# Altium PCB PCB1.PcbDoc
Units mm, origin at the board's own origin, x right, y up, seen from the top; angles counter-clockwise.
Board outline 48.7 x 34.7 mm, 2 copper layers (Top Layer, Bottom Layer); 20 components, 15 nets, 109 pads, 24 vias.
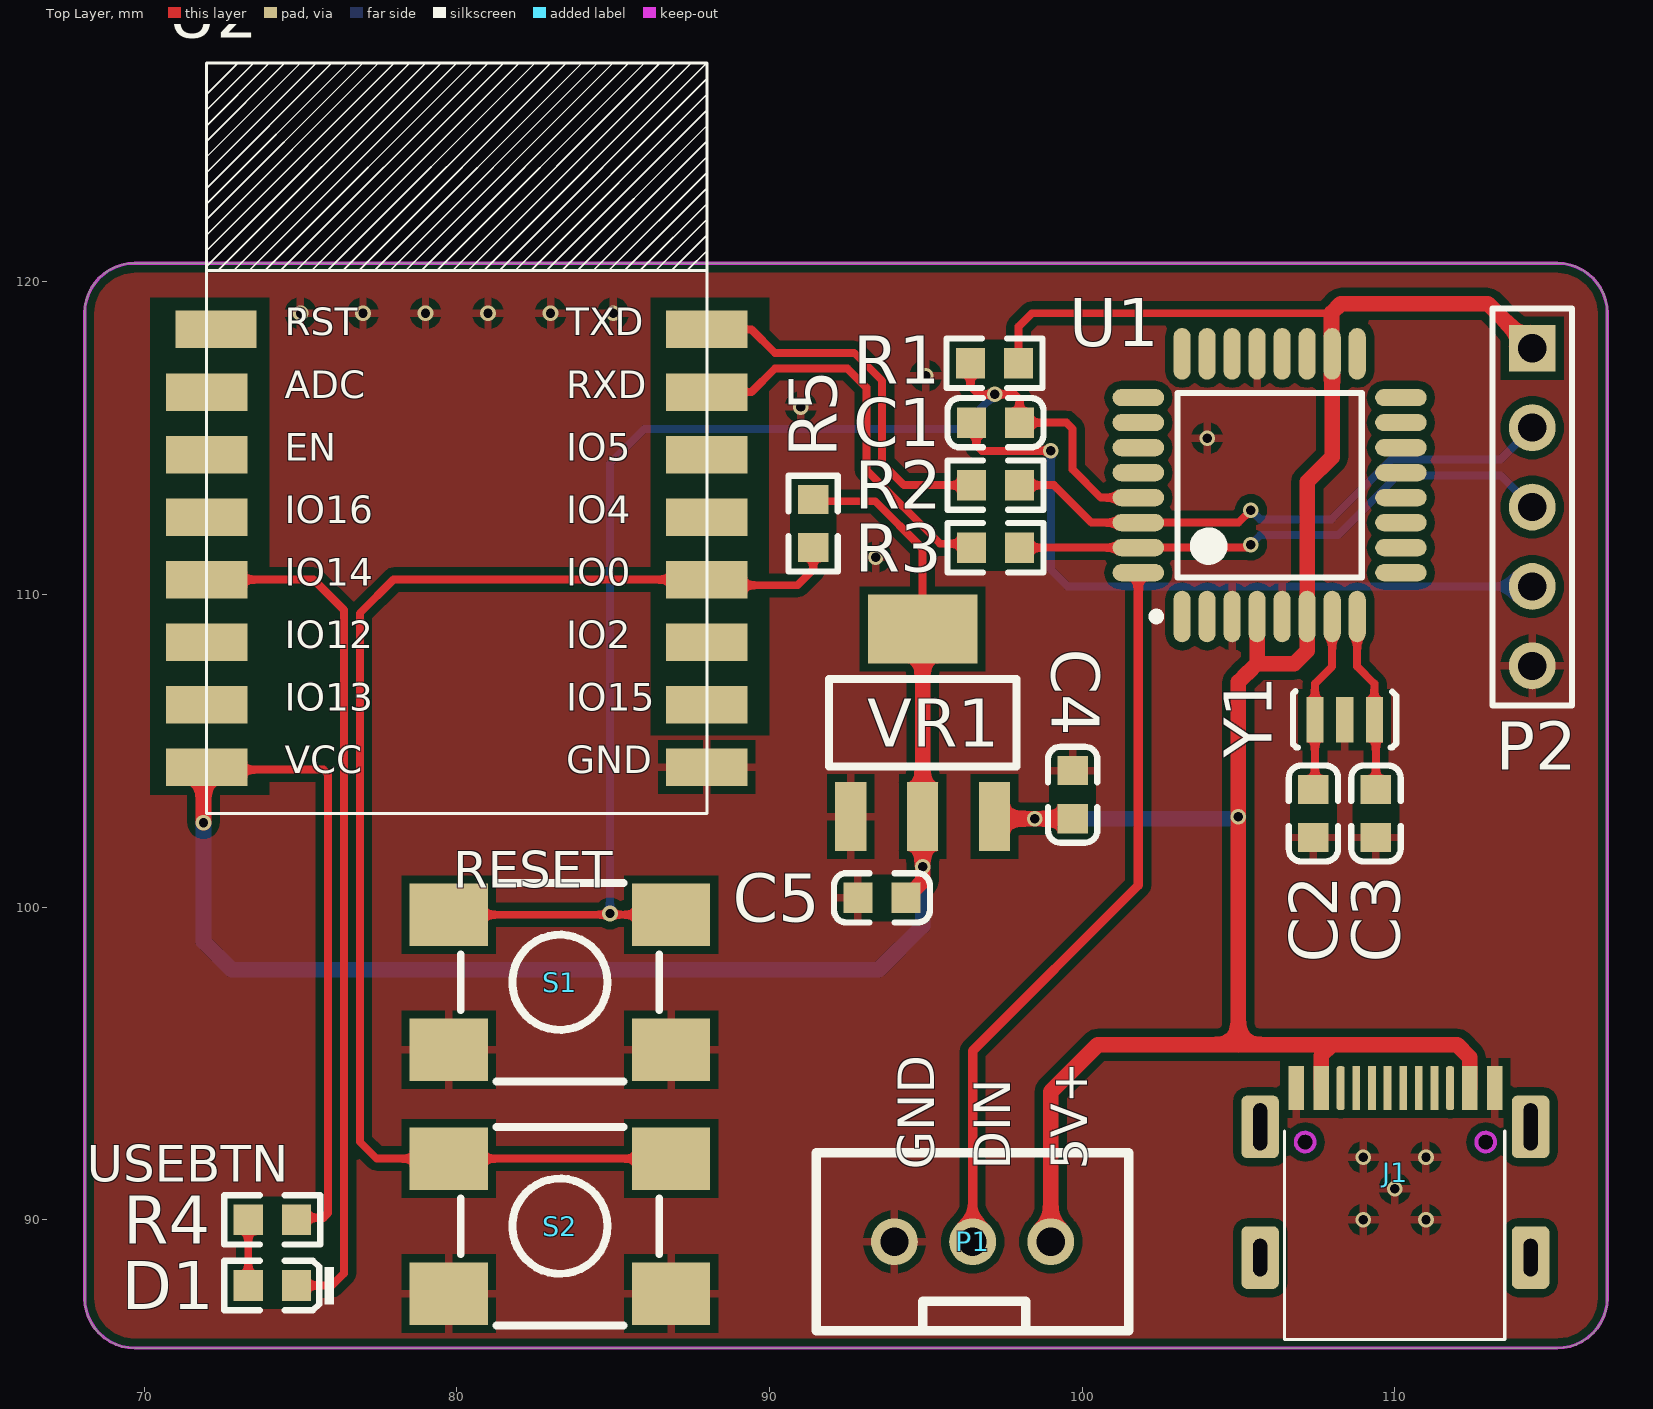
[diagram p0: Top Layer view]
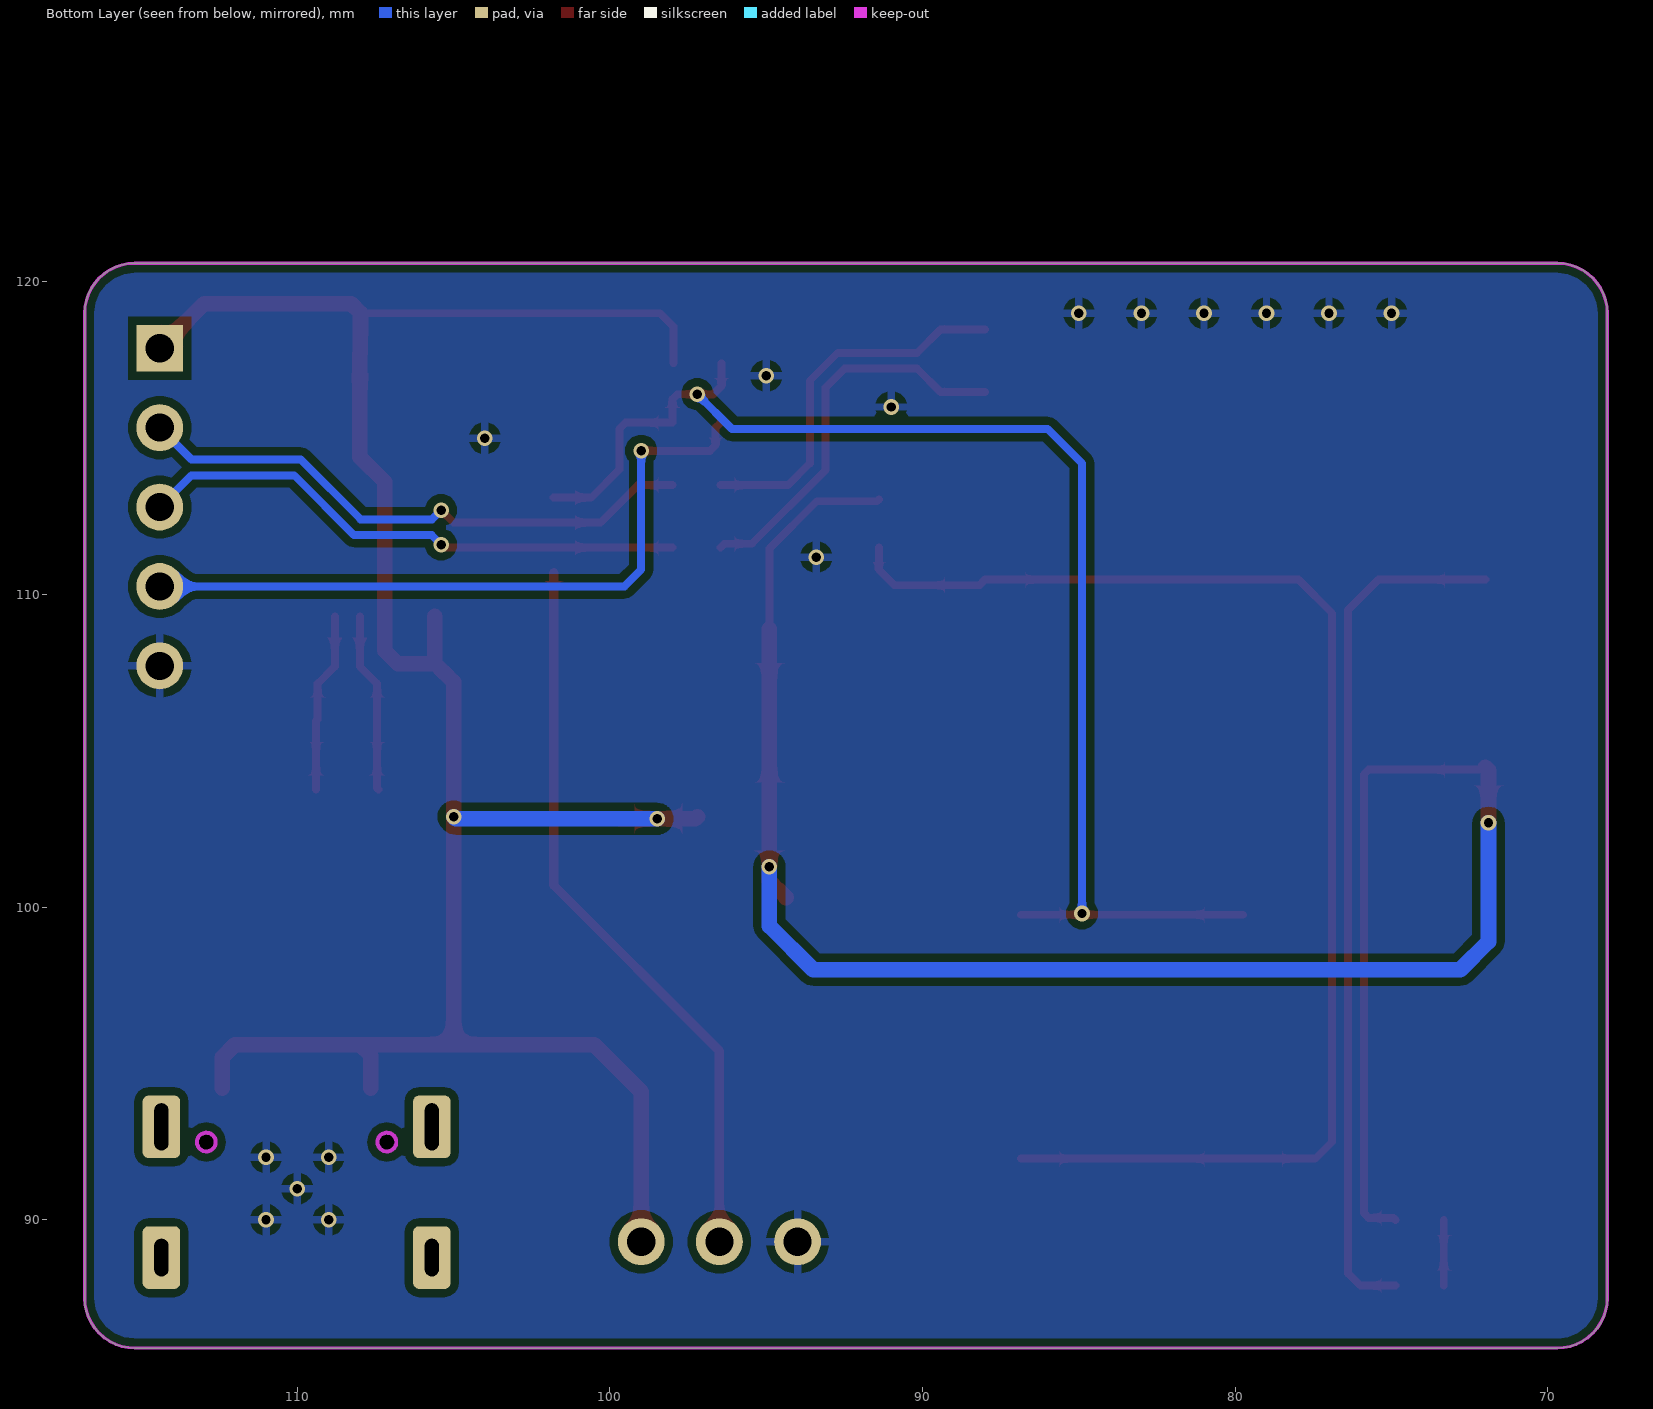
[diagram p1: Bottom Layer view, seen from below]
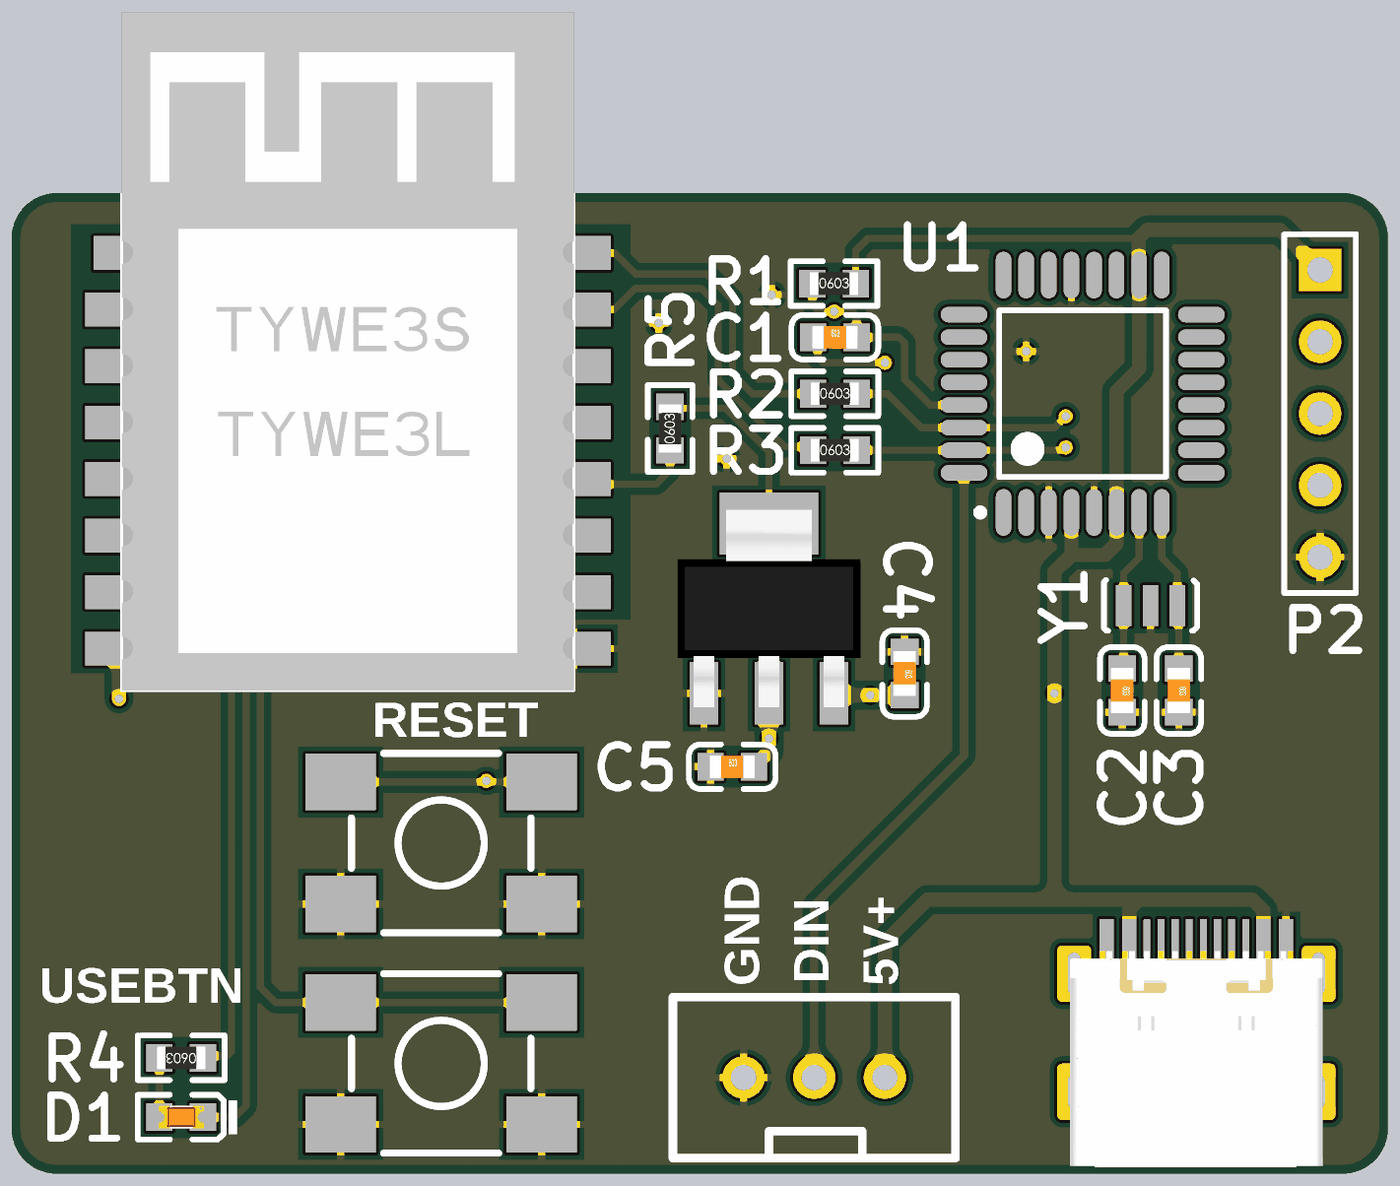
[diagram p2: 3D render of the assembled board from above, using the file's embedded part models]

## Layer stack, top to bottom
Top Solder: solder mask 0.0102, Solder Resist, Dk 3.5
Top Layer: signal copper 0.0356
Dielectric 1: dielectric 0.32, FR-4, Dk 4.8
Bottom Layer: signal copper 0.0356
Bottom Solder: solder mask 0.0102, Solder Resist, Dk 3.5

## Board outline
69.7,85.9 cw(c69.7,87.5) 68.1,87.5 68.1,119 cw(c69.7,119) 69.7,120.6 115.2,120.6 cw(c115.2,119) 116.8,119 116.8,87.5 cw(c115.2,87.5) 115.2,85.9

## Design rules (kind name [scope] priority, off if disabled: settings)
Clearance [All] p1: gap=0.254 ignorepadtopadclearanceinfootprint=FALSE except(0: Arc-Hole Track-Hole SMDPad-Hole THPad-Hole Via-Hole Fill-Hole Poly-Hole Region-Hole Text-Hole)
PolygonConnect [All] p1: connectstyle=Relief reliefconductorwidth=0.254 reliefentries=4 polygonreliefangle="90 Angle" airgapwidth=0.254
RoutingVias [All] p1: holewidth=0.711 width=1.27 viastyle="Through Hole" minholewidth=0.711 minwidth=1.27 maxholewidth=0.711 maxwidth=1.27
SolderMaskExpansion [All] p1: expansion=0.102 istentingtop=FALSE
Width [All] p1: maxlimit=1 minlimit=0.254 preferedwidth=0.254 minimp=50.000000 maximp=50.000000 favimp=50.000000
30 further rules are at their usual default settings.

## Components (designator, comment, footprint, x,y, rotation, side; value= is the part's Value field where it differs from the comment)
C1 "100nF (104) 10% 50V" LC-0603_C 97.23,115.5 r0 top
C2 "22pF (220) 5% 50V" LC-0603_C 107.4,103 r270 top
C3 "22pF (220) 5% 50V" LC-0603_C 109.4,103 r270 top
C4 "100nF (104) 10% 50V" LC-0603_C 99.7,103.6 r270 top
C5 "100nF (104) 10% 50V" LC-0603_C 93.6,100.3 r0 top
D1 "蓝灯 0603" LC-0603_LED_S1 74.1,87.9 r180 top
J1 "type-c" type 110.2,90.5 r180 top
P1 "Header 3" "XH2.54 3P" 96.5,89.3 r180 top
P2 "Header 5" HDR1X5 114.4,117.88 r270 top
R1 "10KΩ (1002) ±1%" LC-0603_R 97.2,117.4 r0 top
R2 "0Ω (0R0) ±1%" LC-0603_R 97.23,113.5 r0 top
R3 "0Ω (0R0) ±1%" LC-0603_R 97.23,111.5 r0 top
R4 "10KΩ (1002) ±1%" LC-0603_R 74.1,90 r180 top
R5 "10KΩ (1002) ±1%" LC-0603_R 91.4,112.27 r90 top
S1 "SW-PB4" SW_PB4_A1 83.3,97.6 r0 top
S2 "SW-PB4" SW_PB4_A1 83.3,89.8 r0 top
U1 "ATmega328-AU" 32A_N 106,113.5 r90 top
U2 "WIFI_TYWE3S/3L" WIFI_TYWE3S/3L 80,115 r0 top locked
VR1 "AMS1117-3.3" LC-SOT-223 94.9,105.9 r270 top
Y1 "XTAL-3PIN" X-CPX20 108.4,106 r0 top

## Footprints (in the part's own frame and the unit in brackets; to place one, negate y for a bottom-side part, rotate by r counter-clockwise, add the part's x,y. Pads: shape width x height; smd on the part's side, far side on the other; paste and mask are expansions set on the pad)
32A_N [mm] "Thin QFP, 32-Leads, Body 7x7mm, Pitch 0.8mm, IPC Medium Density"
  oval 1.65x0.55 smd: 1(-4.2,2.8) 2(-4.2,2) 3(-4.2,1.2) 4(-4.2,0.4) 5(-4.2,-0.4) 6(-4.2,-1.2) 7(-4.2,-2) 8(-4.2,-2.8) 17(4.2,-2.8) 18(4.2,-2) 19(4.2,-1.2) 20(4.2,-0.4) 21(4.2,0.4) 22(4.2,1.2) 23(4.2,2) 24(4.2,2.8)
  oval 0.55x1.65 smd: 9(-2.8,-4.2) 10(-2,-4.2) 11(-1.2,-4.2) 12(-0.4,-4.2) 13(0.4,-4.2) 14(1.2,-4.2) 15(2,-4.2) 16(2.8,-4.2) 25(2.8,4.2) 26(2,4.2) 27(1.2,4.2) 28(0.4,4.2) 29(-0.4,4.2) 30(-1.2,4.2) 31(-2,4.2) 32(-2.8,4.2)
  silkscreen extent -4.32,-2.95 2.95,3.75, body extent -3.5,-3.5 3.5,3.5, height 1.2
HDR1X5 [mm] "Connector; Header; 5 Position"
  rect 1.5x1.5 hole 0.9: 1(0,0)
  round 1.5 hole 0.9: 2(2.54,0) 3(5.08,0) 4(7.62,0) 5(10.16,0)
  silkscreen extent -1.27,-1.27 11.43,1.27
LC-0603_C [mm]
  rect 0.93x0.98 smd: 1(-0.77,0) 2(0.77,0)
  silkscreen extent -1.53,-0.79 1.54,0.79, body extent -0.8,-0.4 0.8,0.4, height 0.3
LC-0603_LED_S1 [mm]
  rect 0.93x0.98 smd: A(0.77,0) K(-0.77,0)
  silkscreen extent -1.98,-0.79 1.54,0.79, body extent -0.8,-0.4 0.8,0.4, height 0.6
LC-0603_R [mm]
  rect 0.93x0.98 smd: 1(-0.77,0) 2(0.77,0)
  silkscreen extent -1.53,-0.79 1.54,0.79, body extent -0.85,-0.4 0.85,0.4, height 0.56
LC-SOT-223 [mm]
  rect 2.2x1 smd: 1(3,-2.3) 2(3,0) 3(3,2.3)
  rect 2.2x3.5 smd: 2(-3,0)
  silkscreen extent -1.4,-3 1.4,3, body extent -3.49,-3.24 3.49,3.24, height 1.64
SW_PB4_A1 [mm]
  rect 2.5x2 smd: 1(-3.556,2.159) 2(-3.556,-2.159) 3(3.556,-2.159) 4(3.556,2.159)
  silkscreen extent -3.17,-3.17 3.17,3.17, body extent -3.17,-3.17 3.17,3.17, height 6
type [mm]
  rrect30% 1.2x2 hole 0.45 slot 1.5 at 90 deg: 1(-4.146,-2.476) 2(4.504,-2.476)
  rrect30% 1.2x2 hole 0.45 slot 1.2 at 90 deg: 3(4.504,1.704) 4(-4.146,1.704)
  rect 0.5x1.397 smd: A1B12(3.354,-3.716) A4B9(2.554,-3.716) A9B4(-2.196,-3.716) A12B1(-2.996,-3.716)
  rect 0.25x1.397 smd: A5(1.429,-3.716) A6(0.429,-3.716) A7(-0.071,-3.716) A8(-1.071,-3.716) B6(-0.571,-3.716) B7(0.929,-3.716)
  rrect50% 0.25x1.397 smd: B5(-1.571,-3.716) B8(1.929,-3.716)
  Keep-Out Layer board cut-out: -3.012,-1.989 -2.989,-2.104 -2.924,-2.201 -2.827,-2.266 -2.712,-2.289 -2.712,-2.289 -2.597,-2.266 -2.5,-2.201 -2.435,-2.104 -2.412,-1.989 -2.412,-1.989 -2.435,-1.874 -2.5,-1.777 -2.597,-1.712 -2.712,-1.689 -2.712,-1.689 -2.827,-1.712 -2.924,-1.777 -2.989,-1.874 -3.012,-1.989
  Keep-Out Layer board cut-out: 2.766,-1.989 2.789,-2.104 2.854,-2.201 2.951,-2.266 3.066,-2.289 3.066,-2.289 3.181,-2.266 3.278,-2.201 3.343,-2.104 3.366,-1.989 3.366,-1.989 3.343,-1.874 3.278,-1.777 3.181,-1.712 3.066,-1.689 3.066,-1.689 2.951,-1.712 2.854,-1.777 2.789,-1.874 2.766,-1.989
  Keep-Out Layer circle w0.127: c3.066,-1.989 r0.3
  Keep-Out Layer circle w0.127: c-2.712,-1.989 r0.3
  silkscreen extent -3.32,-2.34 3.73,4.33, body extent -4.29,-3.27 4.65,4.33, height 3.28
WIFI_TYWE3S/3L [mm]
  rect 2.6x1.2 smd: 1(-7.7,3.48) 2(-8,1.48) 3(-8,-0.52) 4(-8,-2.52) 5(-8,-4.52) 6(-8,-6.52) 7(-8,-8.52) 8(-8,-10.52) 9(8,-10.52) 10(8,-8.52) 11(8,-6.52) 12(8,-4.52) 13(8,-2.52) 14(8,-0.52) 15(8,1.48) 16(8,3.48)
  silkscreen extent -8.01,-12 8.03,12.01, body extent -8,-12 8,12, height 3.1
X-CPX20 [mm] "贴片晶振"
  rect 0.55x1.45 smd: 1(-0.95,0) 2(0,0) 3(0.95,0)
  silkscreen extent -1.65,-0.89 1.65,0.91
"XH2.54 3P" [mm]
  round 1.5 hole 0.9: 1(-2.5,0) 2(0,0) 3(2.5,0)
  silkscreen extent -5,-2.85 5,2.85

## Part data
C1 C4 C5: library part "0603 100nF (104) 10% 50V", "贴片电容", Package=0603, SuppliersPartNumber=C14663, ComponentLink1Description=供应商链接, ComponentLink1URL=http://www.szlcsc.com/product/details_15331.html, Supplier=LC
C2 C3: library part "0603 22pF (220) 5% 50V", "贴片电容", Package=0603, SuppliersPartNumber=C1653, ComponentLink1Description=供应商链接, ComponentLink1URL=http://www.szlcsc.com/product/details_2005.html, Supplier=LC
D1: library part "0603 蓝灯", "发光二极管", Package=0603, SuppliersPartNumber=C72041, ComponentLink1Description=供应商链接, ComponentLink1URL=http://www.szlcsc.com/product/details_73150.html, Supplier=LC
P1: "Header, 3-Pin", LatestRevisionDate=17-Jul-2002, LatestRevisionNote="Re-released for DXP Platform.", Publisher="Altium Limited"
P2: "Header, 5-Pin", LatestRevisionDate=17-Jul-2002, LatestRevisionNote="Re-released for DXP Platform.", Publisher="Altium Limited"
R1 R4 R5: library part "0603 10KΩ (1002) 1%", "贴片电阻", Package=0603, SuppliersPartNumber=C25804, ComponentLink1Description=供应商链接, ComponentLink1URL=http://www.szlcsc.com/product/details_26547.html, Supplier=LC
R2 R3: library part "0603 0Ω (0R0) 1%", "贴片电阻", Package=0603, SuppliersPartNumber=C21189, ComponentLink1Description=供应商链接, ComponentLink1URL=http://www.szlcsc.com/product/details_21903.html, Supplier=LC
S1 S2: "微动开关", LatestRevisionDate=17-Jul-2002, LatestRevisionNote="Re-released for DXP Platform.", PackageReference=SPST-2, Published=24-Mar-1999, Publisher="Altium Limited"
U1: "8-bit AVR Microcontroller, 32KB Flash, 1KB EEPROM, 2KB SRAM, 32-pin TQFP, Industrial Grade (-40癈 to 85癈)", Supplier Part Number 1=ATMEGA328-AU-ND, Code_JEDEC=MS-026-ABA, ComponentLink1Description="Manufacturer Link", ComponentLink1URL=http://www.atmel.com/products/avr/default.asp?, ComponentLink2Description="ATmega48A/48PA/88A/88PA/168A/168PA/328/328P Datasheet", ComponentLink2URL=http://www.atmel.com/dyn/resources/prod_documents/8271.pdf, ComponentLink3Description="ATmega48A/48PA/88A/88PA/168A/168PA/328/328P Summary", ComponentLink3URL=http://www.atmel.com/dyn/resources/prod_documents/8271S.pdf, ComponentLink4Description="Atmel.com Home", ComponentLink4URL=http://www.atmel.com, DatasheetVersion="revA, Jan-2010", PackageDescription="32-Lead, 7x7x1.0 mm Body, 0.8mm Lead Pitch, Thin Profile Plastic Quad Flat Package (TQFP)", PackageReference=32A, PackageVersion="revB, Oct-2001", Published=1-Apr-2010, Publisher="Altium Limited", Supplier 1=Digi-Key, Supplier 2=Mouser, Supplier Part Number 2=556-ATMEGA328-AU
U2: "Module"
VR1: library part "SOT-223 AMS1117-3.3", "低压差线性稳压(LDO)", Package=SOT-223, SuppliersPartNumber=C6186, ComponentLink1Description=供应商链接, ComponentLink1URL=http://www.szlcsc.com/product/details_6652.html, Supplier=LC
Y1: "贴片晶振"

## Via types
v1: diameter 0.5, hole 0.3, Top Layer to Bottom Layer, 24 vias

## Nets (pads, with @x,y where several pads share a name; then routed paths per layer and width w, separated by ;. In a path a pad name is that pad's centre, name@x,y a point inside that pad or via, vN(x,y) a via of type N, cw(c..) or ccw(c..) an arc to the next point about the centre after c; other vN are vias at no path point)
BTN: R5.1 S2.1 S2.4 U2.12 | length 43
  Top Layer w0.254: S2.4 S2.1 77.441,91.959 76.9,92.5 76.9,109.4 77.98,110.48 U2.12 88.18,110.3 90.9,110.3 91.4,110.8 R5.1
DTR: C1.1 P2.4 | length 22.7
  Top Layer w0.254: C1.1 96.622,115.338 96.622,114.778 96.8,114.6 v1(99,114.6)
  Bottom Layer w0.254: v1(99,114.6) 99,110.8 99.54,110.26 P2.4
GND: C2.2 C3.2 C4.1 C5.1 J1.A1B12 J1.A12B1 P1.3 P2.5 S1.2 S1.3 S2.2 S2.3 U1.3 U1.5 U1.21 U2.9 VR1.1 Y1.2
  other v1: 109,90 111,90 110,91 109,92 111,92 93.4,111.2 104,115 91,116 95,117 75,119 77,119 79,119 81,119 83,119 85,119
LED: D1.K U2.5 | length 27.7
  Top Layer w0.254: U2.5 75.42,110.48 76.392,109.508 76.392,88.292 76,87.9 D1.K
NetC1_2: C1.2 R1.1 S1.1 S1.4 U1.29 | length 43.5
  Top Layer w0.254: S1.1 S1.4 ; R1.1 96.43,116.67 96.7,116.4 97.197,116.4 v1(97.206,116.409) 97.843,116.409 98,116.251 C1.2 99.5,115.5 99.7,115.3 99.7,114 100.6,113.1 U1.29
  Bottom Layer w0.254: v1(84.9,99.8) 84.9,114.2 86,115.3 96.097,115.3 v1(97.206,116.409)
NetC2_1: C2.1 U1.7 Y1.1 | length 5.8
  Top Layer w0.254: C2.1 107.45,103.82 Y1.1 107.45,107.15 108,107.7 U1.7
NetC3_1: C3.1 U1.8 Y1.3 | length 5.8
  Top Layer w0.254: U1.8 108.8,107.7 109.35,107.15 Y1.3 109.4,105.95 C3.1
NetD1_A: D1.A R4.2 | length 2.1
  Top Layer w0.254: D1.A R4.2
NetR2_1: R2.1 U2.16 | length 12.1
  Top Layer w0.254: U2.16 89.427,118.48 90.173,117.734 92.71,117.734 93.608,116.836 93.608,114.2 94.308,113.5 R2.1
NetR3_1: R3.1 U2.15 | length 12.7
  Top Layer w0.254: U2.15 89.427,116.48 90.173,117.226 92.5,117.226 93.1,116.626 93.1,113.99 95.463,111.627 96.333,111.627 R3.1
RXD: P2.2 R2.2 U1.30 | length 18.4
  Top Layer w0.254: R2.2 99.1,113.5 100.3,112.3 U1.30 105,112.3 v1(105.4,112.7)
  Bottom Layer w0.254: v1(105.4,112.7) 105.692,112.408 107.974,112.408 109.89,114.324 113.384,114.324 P2.2
TXD: P2.3 R3.2 U1.31 | length 17.8
  Top Layer w0.254: R3.2 U1.31 105.233,111.5 105.333,111.6 v1(105.4,111.6)
  Bottom Layer w0.254: v1(105.4,111.6) 105.7,111.9 108.184,111.9 110.1,113.816 113.384,113.816 P2.3
VCC: C4.2 J1.A4B9 J1.A9B4 P1.1 P2.1 R1.2 U1.4 U1.6 U1.18 VR1.3 | length 75.9
  Top Layer w0.254: R1.2 97.97,118.57 98.4,119 107.972,119 107.979,119.007
  Top Layer w0.5: VR1.3 97.27,102.83 v1(98.485,102.83) C4.2 ; P1.1 99,94.1 100.5,95.6 105,95.6 ; U1.4 105.6,107.793 ; J1.A4B9 107.646,95.254 107.993,95.6 ; J1.A9B4 112.396,95.204 112,95.6 107.993,95.6 ; P2.1 112.98,119.3 108.272,119.3 107.979,119.007 107.979,118.306 107.99,118.295 107.99,117.71 U1.18 108,114.4 107.2,113.6 U1.6 107.2,108.2 106.793,107.793 105.6,107.793 ; 105,95.6 v1(105,102.9) 105,107.207 105.293,107.5 105.307,107.5 105.6,107.793 ; 105,95.6 107.993,95.6
  Bottom Layer w0.5: v1(98.485,102.83) 104.93,102.83 v1(105,102.9)
VCC_3V3: C5.2 R4.1 R5.2 U2.8 VR1.2 | length 66.1
  Top Layer w0.254: U2.8 72.08,104.4 75.735,104.4 75.884,104.251 75.884,90.216 75.735,90.067 74.937,90.067 R4.1 ; R5.2 91.454,112.986 93.386,112.986 94.9,111.471 VR1.2@94.9,108.9
  Top Layer w0.5: v1(71.9,102.7) 71.9,104.38 U2.8 ; C5.2 94.37,100.325 94.585,100.54 94.607,100.54 94.9,100.833 v1(94.9,101.3) 94.9,102.9 VR1.2@94.9,108.9
  Bottom Layer w0.5: v1(71.9,102.7) 71.9,98.9 72.8,98 93.5,98 94.9,99.4 v1(94.9,101.3)
WSPIN: P1.2 U1.32 | length 23.6
  Top Layer w0.3: P1.2 96.5,95.4 101.8,100.7 U1.32
pads on no net: J1.1 J1.2 J1.3 J1.4 J1.A5 J1.A6 J1.A7 J1.A8 J1.B5 J1.B6 J1.B7 J1.B8 U1.1 U1.2 U1.9 U1.10 U1.11 U1.12 U1.13 U1.14 U1.15 U1.16 U1.17 U1.19 U1.20 U1.22 U1.23 U1.24 U1.25 U1.26 U1.27 U1.28 U2.1 U2.2 U2.3 U2.4 U2.6 U2.7 U2.10 U2.11 U2.13 U2.14

## Polygon pours and split planes (outlines as drawn)
GND on Bottom Layer "GND_L02_P001" (solid, remove dead copper, pour order 1): 67.4,121.8 67.4,84.6 68.2,85.4 118.1,85.4 118.1,120.6 117,121.7
GND on Top Layer "GND_L01_P000" (solid, remove dead copper, pour order 0): 67.8,121.3 67.8,84.4 117.3,84.4 117.7,84.8 117.5,85 117.5,121.2

## Keep-outs
Keep-Out Layer:
  lines w0.1: 116.8,87.5 116.8,119 ccw(c115.2,119) 115.2,120.6 81.3,120.6 69.7,120.6 ccw(c69.7,119) 68.1,119 68.1,87.5 ccw(c69.7,87.5) 69.7,85.9 115.2,85.9 ccw(c115.2,87.5) 116.8,87.5

## Other copper
Top Layer:
  pour cut-out: 86.2,119.5 86.2,105.5 90,105.5 90,119.5
  pour cut-out: 70.2,119.5 70.2,103.6 74,103.6 74,119.5

## Silkscreen, mask and mechanical layers (free items; w line width, h text height)
Top Overlay:
  text "RESET" at 79.886,100.238 h2
  text "GND" at 95.662,91.601 h2 r90
  text "DIN" at 98.095,91.601 h2 r90
  text "5V+" at 100.552,91.601 h2 r90
  text "USEBTN" at 68.161,90.838 h2

## Text inside footprints (layer, text, board x,y; h text height)
U2: Top Overlay "RST" at 74.5,118 h1.5; Top Overlay "ADC" at 74.5,116 h1.5; Top Overlay "EN" at 74.5,114 h1.5; Top Overlay "IO16" at 74.5,112 h1.5; Top Overlay "IO14" at 74.5,110 h1.5; Top Overlay "IO12" at 74.5,108 h1.5; Top Overlay "IO13" at 74.5,106 h1.5; Top Overlay "VCC" at 74.5,104 h1.5; Top Overlay "GND" at 83.5,104 h1.5; Top Overlay "IO15" at 83.5,106 h1.5; Top Overlay "IO2" at 83.5,108 h1.5; Top Overlay "IO0" at 83.5,110 h1.5; Top Overlay "IO4" at 83.5,112 h1.5; Top Overlay "IO5" at 83.5,114 h1.5; Top Overlay "RXD" at 83.5,116 h1.5; Top Overlay "TXD" at 83.5,118 h1.5